# Altium PCB PCB1.PcbDoc
Units mm, origin at the board's own origin, x right, y up, seen from the top; angles counter-clockwise.
Board outline 106.68 x 55.88 mm, 4 copper layers (Top Layer, Layer 1, Layer 2, Bottom Layer), stack 0.806 mm thick; 33 components, 62 nets, 472 pads, 403 vias.
Unrouted connection lines stored in the file: 1.
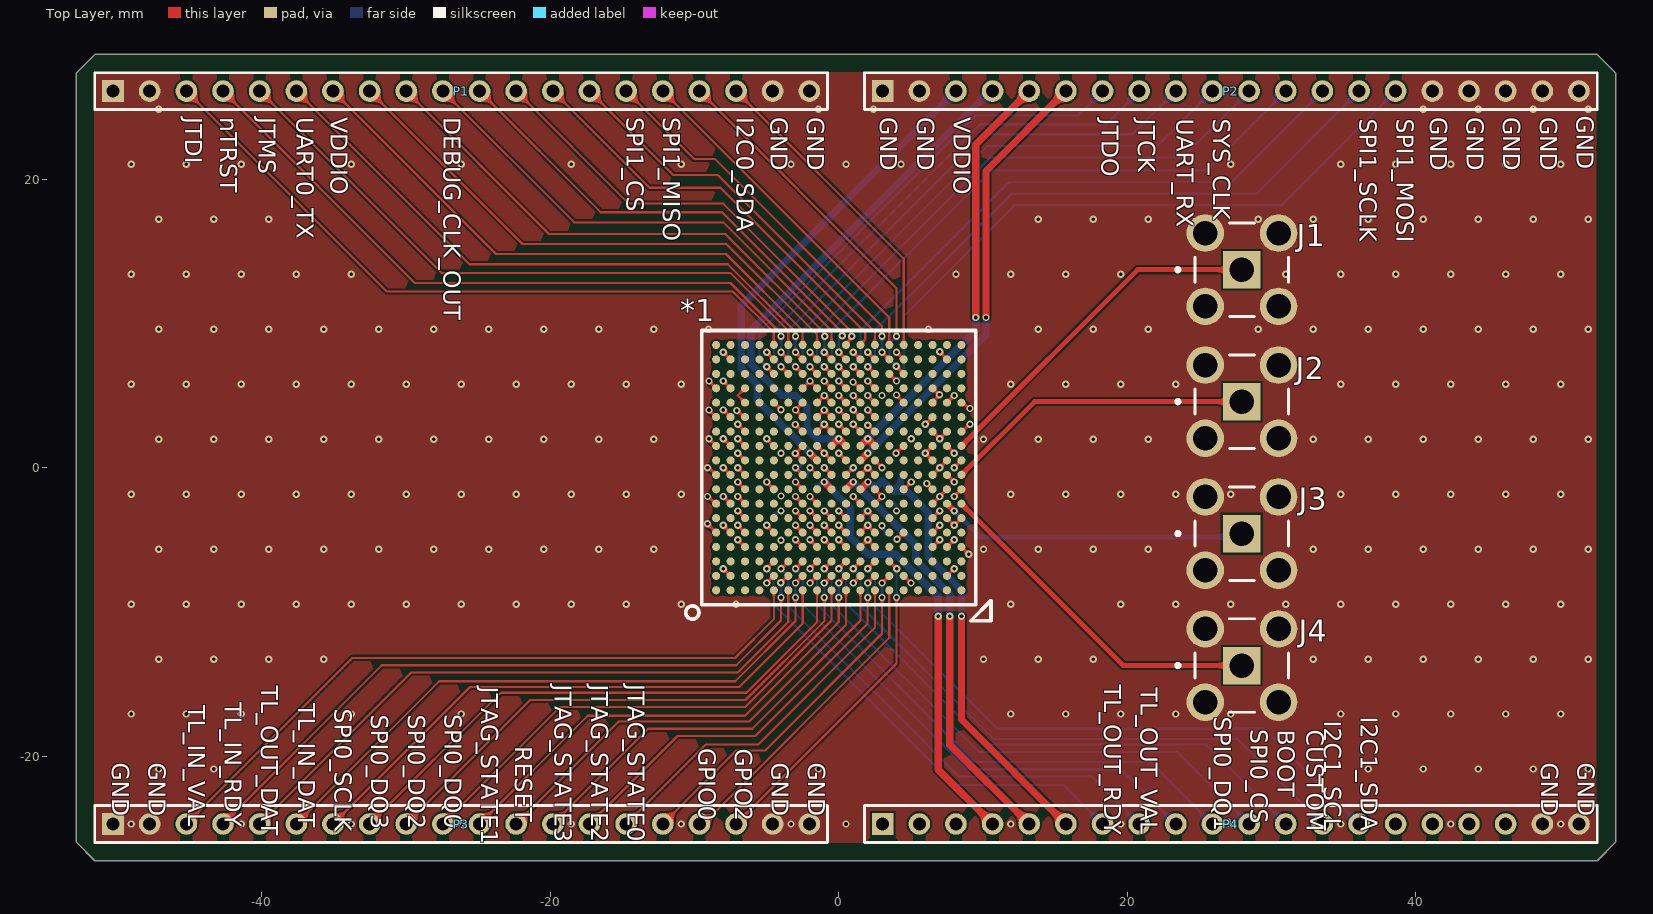
[diagram p0: Top Layer view]
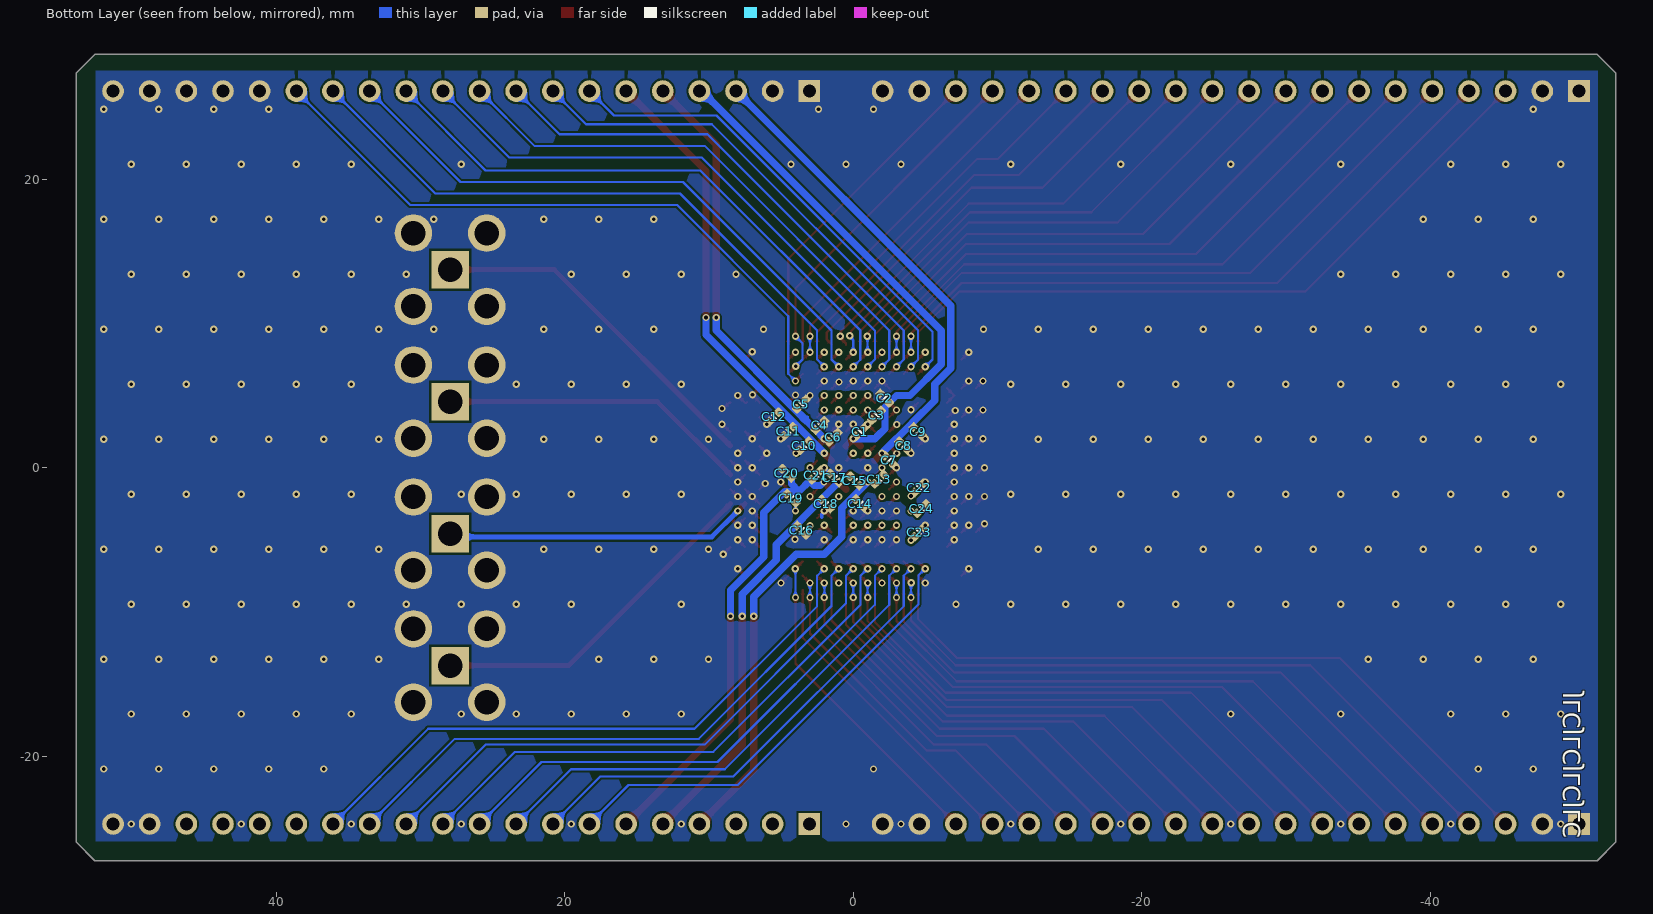
[diagram p1: Bottom Layer view, seen from below]
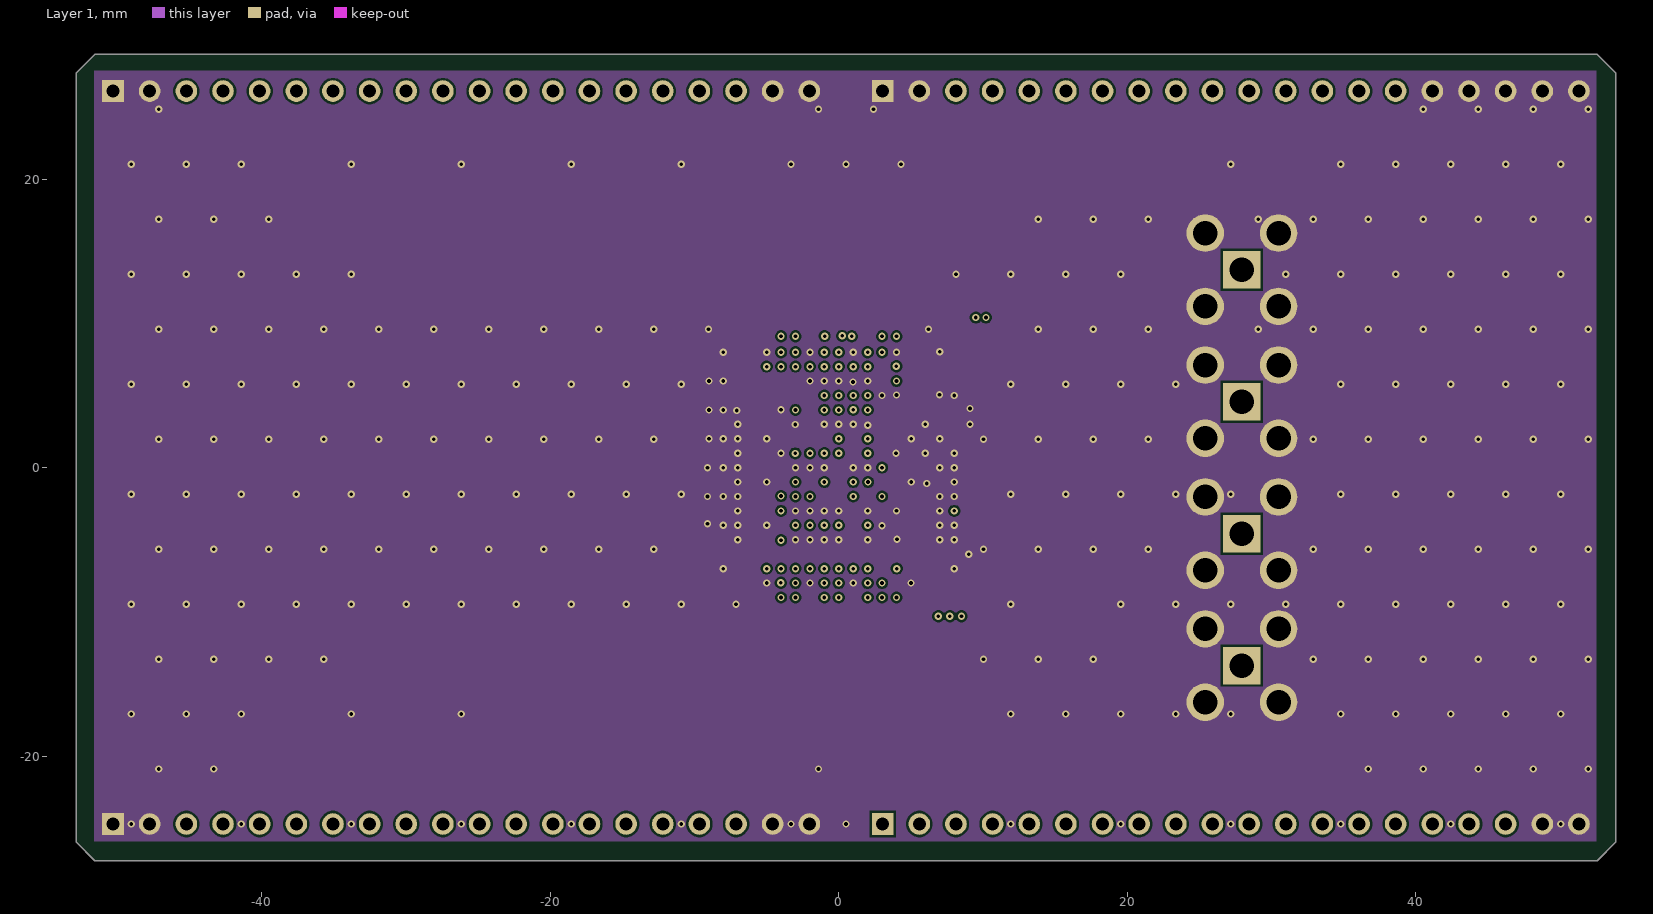
[diagram p2: Layer 1]
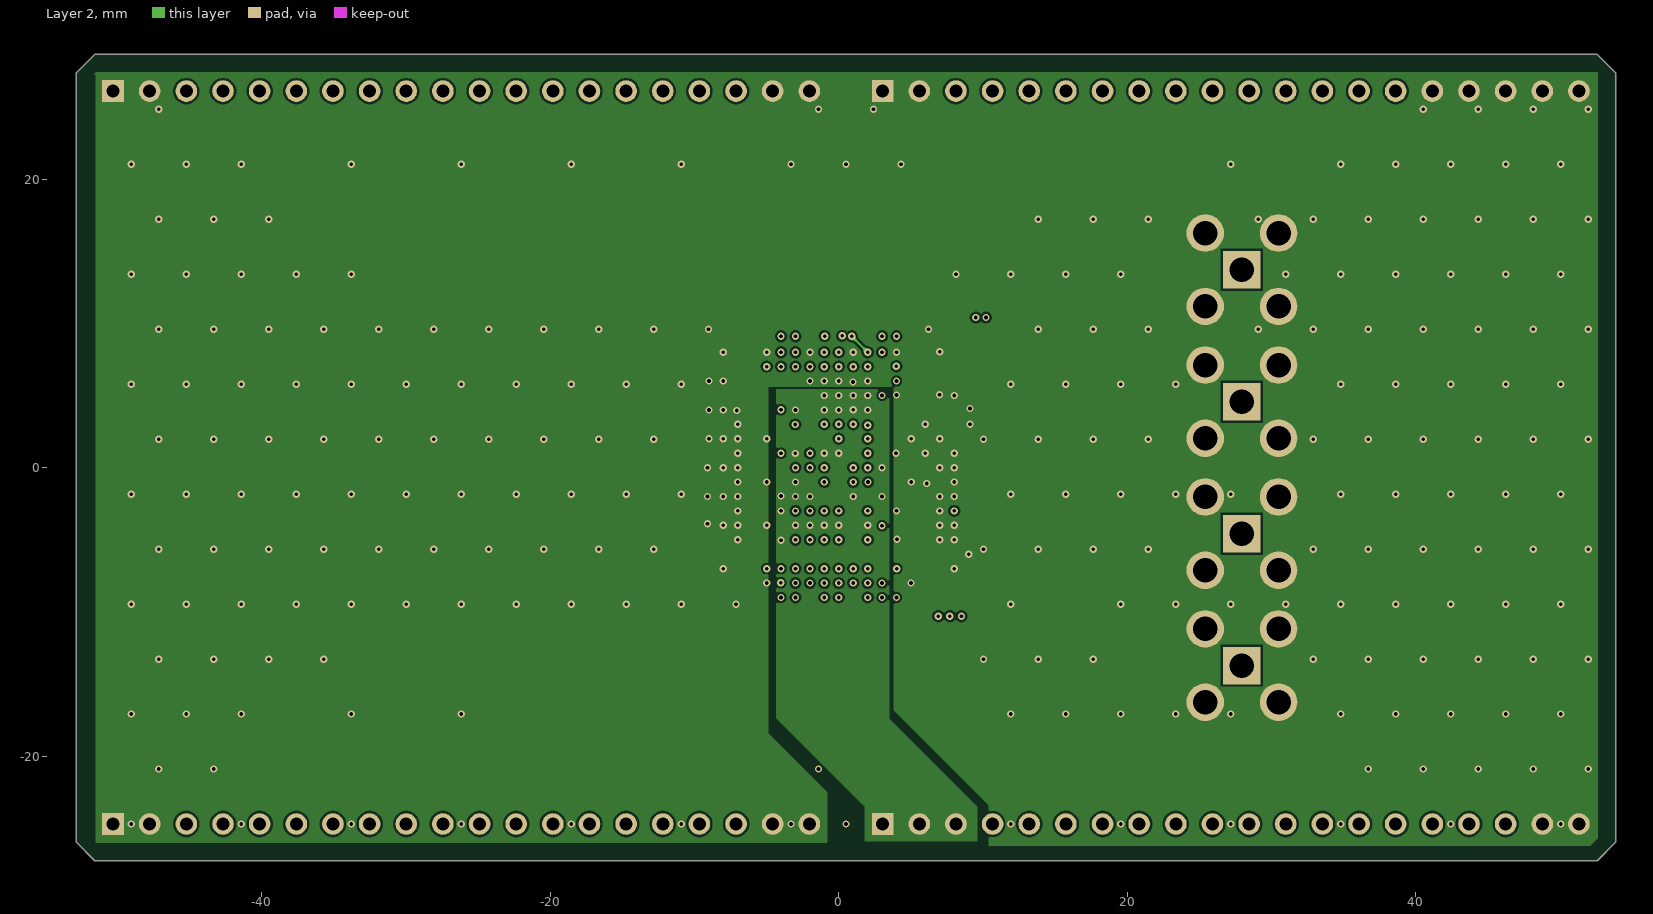
[diagram p3: Layer 2]
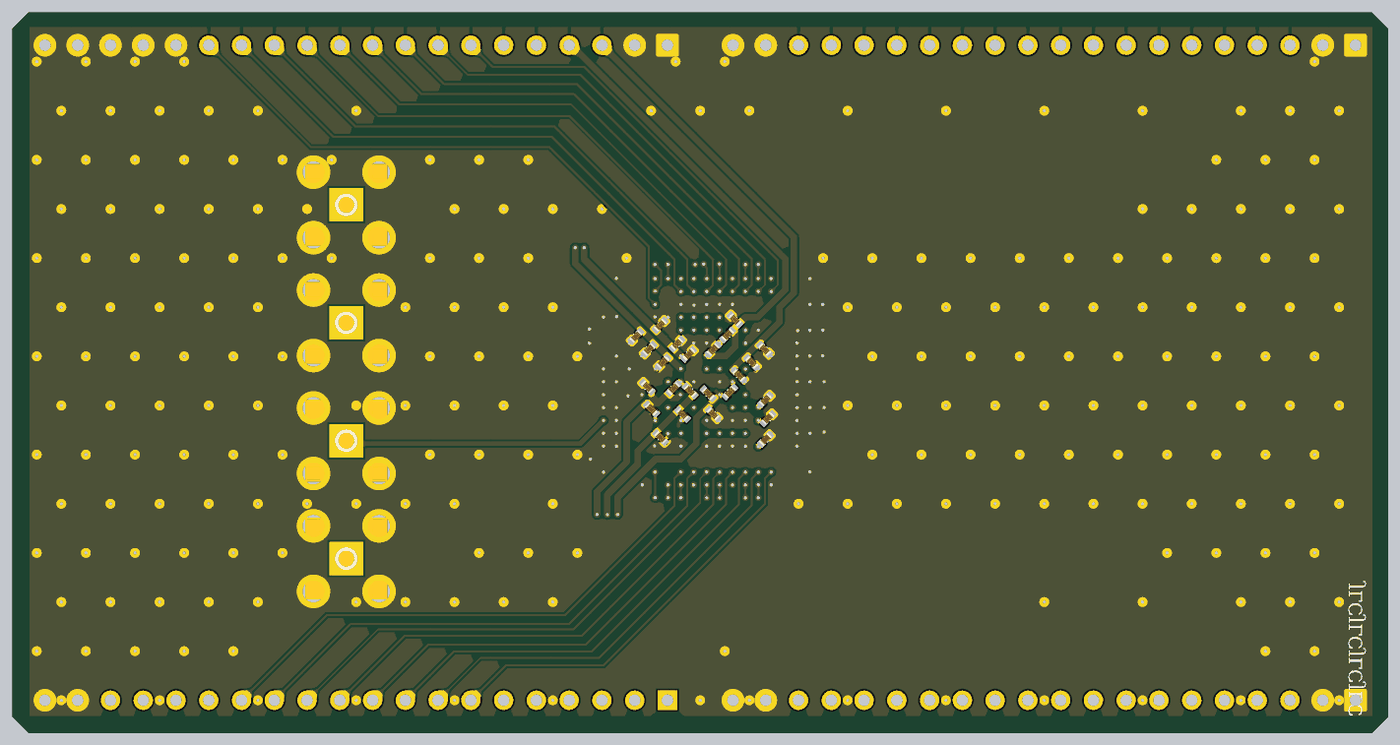
[diagram p4: 3D render of the assembled board from below, using the file's embedded part models]

## Layer stack, top to bottom
Top Solder: solder mask 0.0102, Solder Resist, Dk 3.5
Top Layer: signal copper 0.0175
Dielectric 2: prepreg 0.0889, PP-013, Dk 4.3
Dielectric 4: prepreg 0.1016, PP-016, Dk 4.4
Layer 1: signal copper 0.035
Dielectric 1: dielectric 0.32, FR-4, Dk 4.8
Layer 2: signal copper 0.035
Dielectric 5: prepreg 0.1016, PP-016, Dk 4.4
Dielectric 3: prepreg 0.0889, PP-013, Dk 4.3
Bottom Layer: signal copper 0.0175
Bottom Solder: solder mask 0.0102, Solder Resist, Dk 3.5

## Board outline
-52.84,-25.97 -52.84,27.37 -51.57,28.64 52.57,28.64 53.84,27.37 53.84,-25.97 52.57,-27.24 -51.57,-27.24

## Design rules (kind name [scope] priority, off if disabled: settings)
Clearance [InNetClass('All Nets')] p1: gap=0.152 ignorepadtopadclearanceinfootprint=FALSE except(0.203: Arc-Hole Track-Hole)
FabricationTestPointUsage TestPointUsage [All] p1: valid=0 allowmultiple=FALSE
FabricationTestpoint Testpoint [All] p1: side=3 testpointundercomponent=TRUE minsize=1.016 maxsize=2.54 preferedsize=1.524 minholesize=0.508 maxholesize=1.016 preferedholesize=0.813 testpointgrid=0.025 allowsidetop=TRUE allowsidebottom=TRUE usegrid=TRUE gridtolerance=0
HoleSize [All] p1: absolutevalues=TRUE maxlimit=6.274 minlimit=0.254 maxpercent=80.000 minpercent=20.000
PasteMaskExpansion PasteMaskExpansion_1 [InComponent('P1')] p1: expansion=-3.81
PasteMaskExpansion [All] p2: expansion=0
PlaneClearance [All] p1: clearance=0.152
PlaneConnect [All] p1: planeconnectstyle=Relief reliefexpansion=0.381 reliefentries=4 reliefconductorwidth=0.254 reliefairgap=0.254
PolygonConnect [All] p1: connectstyle=Direct reliefconductorwidth=0.254 reliefentries=4 polygonreliefangle="90 Angle" airgapwidth=0.254
RoutingVias [All] p1: holewidth=0.254 width=0.508 viastyle="Through Hole" minholewidth=0.254 minwidth=0.508 maxholewidth=0.381 maxwidth=1.27
SilkToSolderMaskClearance SilkscreenOverComponentPads [IsPad] p1: minsilkscreentomaskgap=0.254 clearancetoexposedcopper=TRUE
SolderMaskExpansion [All] p1: expansion=0.127 istentingtop=FALSE
UnRoutedNet [All] p1: checkbadconnections=TRUE
Width RF_Stuff [InNet('PADN_LVDS_TX1')] p1: maxlimit=0.348 minlimit=0.168 preferedwidth=0.348 toplayer_minwidth=0.348 midlayer1_maxwidth=0.168 midlayer1_prefwidth=0.168 midlayer2_maxwidth=0.168 midlayer2_prefwidth=0.168 bottomlayer_minwidth=0.348 impedanceprofiledriven=TRUE impedanceprofileid={181A9B05-3AD5-4B76-A0AB-F29331F9D4F9} impedanceprofilevalue=50.000000 minimp=50.000000 maximp=50.000000 favimp=50.000000
Width RF_Stuff_1 [InNet('PADN_LVDS_TX2')] p2: maxlimit=0.348 minlimit=0.168 preferedwidth=0.348 toplayer_minwidth=0.348 midlayer1_maxwidth=0.168 midlayer1_prefwidth=0.168 midlayer2_maxwidth=0.168 midlayer2_prefwidth=0.168 bottomlayer_minwidth=0.348 impedanceprofiledriven=TRUE impedanceprofileid={181A9B05-3AD5-4B76-A0AB-F29331F9D4F9} impedanceprofilevalue=50.000000 minimp=50.000000 maximp=50.000000 favimp=50.000000
Width RF_Stuff_2 [InNet('PADP_LVDS_RX')] p3: maxlimit=0.348 minlimit=0.168 preferedwidth=0.348 toplayer_minwidth=0.348 midlayer1_maxwidth=0.168 midlayer1_prefwidth=0.168 midlayer2_maxwidth=0.168 midlayer2_prefwidth=0.168 bottomlayer_minwidth=0.348 impedanceprofiledriven=TRUE impedanceprofileid={181A9B05-3AD5-4B76-A0AB-F29331F9D4F9} impedanceprofilevalue=50.000000 minimp=50.000000 maximp=50.000000 favimp=50.000000
Width RF_Stuff_3 [InNet('PADN_LVDS_RX')] p4: maxlimit=0.348 minlimit=0.168 preferedwidth=0.348 toplayer_minwidth=0.348 midlayer1_maxwidth=0.168 midlayer1_prefwidth=0.168 midlayer2_maxwidth=0.168 midlayer2_prefwidth=0.168 bottomlayer_minwidth=0.348 impedanceprofiledriven=TRUE impedanceprofileid={181A9B05-3AD5-4B76-A0AB-F29331F9D4F9} impedanceprofilevalue=50.000000 minimp=50.000000 maximp=50.000000 favimp=50.000000
Width Width_1 [All] p5: maxlimit=0.508 minlimit=0.127 preferedwidth=0.254 minimp=50.000000 maximp=50.000000 favimp=50.000000
22 further rules are at their usual default settings.

## Classes and differential pairs
component class Sheet1: Bearly C1 C6 C7 C9 C13 C14 C16 C20 dut J1 J2 J3 J4 P1 P2 P3 P4

## Components (designator, comment, footprint, x,y, rotation, side; value= is the part's Value field where it differs from the comment)
*1 "General" BGA324x18 -8.5,8.5 r0 top locked
C1 "Capacitor 100nF +/-20% 50V 0402" CAPC0402(1005)60_L -0.5,2.5 r315 bottom value=100nF
C2 "Capacitor 1µF +/-20% 10V 0402" CAPC0402(1005)60_L -2.182,4.818 r225 bottom value=1µF
C3 "Capacitor 10µF +/-40% 6.3V 0402" CAPC0402(1005)60_L -1.627,3.642 r135 bottom value=10µF
C4 "Capacitor 100nF +/-20% 50V 0402" CAPC0402(1005)60_L 2.303,2.928 r315 bottom value=100nF
C5 "Capacitor 1µF +/-20% 10V 0402" CAPC0402(1005)60_L 3.6,4.4 r315 bottom value=1µF
C6 "Capacitor 10µF +/-40% 6.3V 0402" CAPC0402(1005)60_L 1.382,2.118 r315 bottom value=10µF
C7 "Capacitor 100nF +/-20% 50V 0402" CAPC0402(1005)60_L -2.5,0.5 r45 bottom value=100nF
C8 "Capacitor 1µF +/-20% 10V 0402" CAPC0402(1005)60_L -3.5,1.5 r45 bottom value=1µF
C9 "Capacitor 10µF +/-40% 6.3V 0402" CAPC0402(1005)60_L -4.5,2.5 r45 bottom value=10µF
C10 "Capacitor 100nF +/-20% 50V 0402" CAPC0402(1005)60_L 3.382,1.518 r135 bottom value=100nF
C11 "Capacitor 1µF +/-20% 10V 0402" CAPC0402(1005)60_L 4.482,2.518 r135 bottom value=1µF
C12 "Capacitor 10µF +/-40% 6.3V 0402" CAPC0402(1005)60_L 5.482,3.518 r135 bottom value=10µF
C13 "Capacitor 100nF +/-20% 50V 0402" CAPC0402(1005)60_L -1.8,-0.8 r315 bottom value=100nF
C14 "Capacitor 1µF +/-20% 10V 0402" CAPC0402(1005)60_L -0.5,-2.5 r45 bottom value=1µF
C15 "Capacitor 10µF +/-40% 6.3V 0402" CAPC0402(1005)60_L -0.118,-0.918 r225 bottom value=10µF
C16 "Capacitor 100nF +/-20% 50V 0402" CAPC0402(1005)60_L 3.568,-4.329 r45 bottom value=100nF
C17 "Capacitor 1µF +/-20% 10V 0402" CAPC0402(1005)60_L 1.282,-0.718 r225 bottom value=1µF
C18 "Capacitor 10µF +/-40% 6.3V 0402" CAPC0402(1005)60_L 1.882,-2.518 r45 bottom value=10µF
C19 "Capacitor 100nF +/-20% 50V 0402" CAPC0402(1005)60_L 4.282,-2.118 r45 bottom value=100nF
C20 "Capacitor 1µF +/-20% 10V 0402" CAPC0402(1005)60_L 4.6,-0.4 r225 bottom value=1µF
C21 "Capacitor 10µF +/-40% 6.3V 0402" CAPC0402(1005)60_L 2.565,-0.515 r315 bottom value=10µF
C22 "Capacitor 100nF +/-20% 50V 0402" CAPC0402(1005)60_L -4.563,-1.4 r315 bottom value=100nF
C23 "Capacitor 1µF +/-20% 10V 0402" CAPC0402(1005)60_L -4.564,-4.469 r315 bottom value=1µF
C24 "Capacitor 10µF +/-40% 6.3V 0402" CAPC0402(1005)60_L -4.743,-2.842 r315 bottom value=10µF
J1 "1053354-1" FP-1053354-1-MFG 27.94,13.716 r0 top
J2 "1053354-1" FP-1053354-1-MFG 27.94,4.572 r0 top
J3 "1053354-1" FP-1053354-1-MFG 27.94,-4.572 r0 top
J4 "1053354-1" FP-1053354-1-MFG 27.94,-13.716 r0 top
P1 "Header 20" HDR1X20 -50.3,26.1 r0 top
P2 "Header 20" HDR1X20 3.04,26.1 r0 top
P3 "Header 20" HDR1X20 -50.3,-24.7 r0 top
P4 "Header 20" HDR1X20 3.04,-24.7 r0 top

## Footprints (in the part's own frame and the unit in brackets; to place one, negate y for a bottom-side part, rotate by r counter-clockwise, add the part's x,y. Pads: shape width x height; smd on the part's side, far side on the other; paste and mask are expansions set on the pad)
BGA324x18 [mm]
  round 0.56 smd: 1(0,0) 2(1,0) 3(2,0) 4(3,0) 5(4,0) 6(5,0) 7(6,0) 8(7,0) 9(8,0) 10(9,0) 11(10,0) 12(11,0) 13(12,0) 14(13,0) 15(14,0) 16(15,0) 17(16,0) 18(17,0) 19(0,-1) 20(1,-1) 21(2,-1) 22(3,-1) 23(4,-1) 24(5,-1) 25(6,-1) 26(7,-1) 27(8,-1) 28(9,-1) 29(10,-1) 30(11,-1) 31(12,-1) 32(13,-1) 33(14,-1) 34(15,-1) 35(16,-1) 36(17,-1) 37(0,-2) 38(1,-2) 39(2,-2) 40(3,-2) 41(4,-2) 42(5,-2) 43(6,-2) 44(7,-2) 45(8,-2) 46(9,-2) 47(10,-2) 48(11,-2) 49(12,-2) 50(13,-2) 51(14,-2) 52(15,-2) 53(16,-2) 54(17,-2) 55(0,-3) 56(1,-3) 57(2,-3) 58(3,-3) 59(4,-3) 60(5,-3) 61(6,-3) 62(7,-3) 63(8,-3) 64(9,-3) 65(10,-3) 66(11,-3) 67(12,-3) 68(13,-3) 69(14,-3) 70(15,-3) 71(16,-3) 72(17,-3) 73(0,-4) 74(1,-4) 75(2,-4) 76(3,-4) 77(4,-4) 78(5,-4) 79(6,-4) 80(7,-4) 81(8,-4) 82(9,-4) 83(10,-4) 84(11,-4) 85(12,-4) 86(13,-4) 87(14,-4) 88(15,-4) 89(16,-4) 90(17,-4) 91(0,-5) 92(1,-5) 93(2,-5) 94(3,-5) 95(4,-5) 96(5,-5) 97(6,-5) 98(7,-5) 99(8,-5) 100(9,-5) 101(10,-5) 102(11,-5) 103(12,-5) 104(13,-5) 105(14,-5) 106(15,-5) 107(16,-5) 108(17,-5) 109(0,-6) 110(1,-6) 111(2,-6) 112(3,-6) 113(4,-6) 114(5,-6) 115(6,-6) 116(7,-6) 117(8,-6) 118(9,-6) 119(10,-6) 120(11,-6) 121(12,-6) 122(13,-6) 123(14,-6) 124(15,-6) 125(16,-6) 126(17,-6) 127(0,-7) 128(1,-7) 129(2,-7) 130(3,-7) 131(4,-7) 132(5,-7) 133(6,-7) 134(7,-7) 135(8,-7) 136(9,-7) 137(10,-7) 138(11,-7) 139(12,-7) 140(13,-7) 141(14,-7) 142(15,-7) 143(16,-7) 144(17,-7) 145(0,-8) 146(1,-8) 147(2,-8) 148(3,-8) 149(4,-8) 150(5,-8) 151(6,-8) 152(7,-8) 153(8,-8) 154(9,-8) 155(10,-8) 156(11,-8) 157(12,-8) 158(13,-8) 159(14,-8) 160(15,-8) 161(16,-8) 162(17,-8) 163(0,-9) 164(1,-9) 165(2,-9) 166(3,-9) 167(4,-9) 168(5,-9) 169(6,-9) 170(7,-9) 171(8,-9) 172(9,-9) 173(10,-9) 174(11,-9) 175(12,-9) 176(13,-9) 177(14,-9) 178(15,-9) 179(16,-9) 180(17,-9) 181(0,-10) 182(1,-10) 183(2,-10) 184(3,-10) 185(4,-10) 186(5,-10) 187(6,-10) 188(7,-10) 189(8,-10) 190(9,-10) 191(10,-10) 192(11,-10) 193(12,-10) 194(13,-10) 195(14,-10) 196(15,-10) 197(16,-10) 198(17,-10) 199(0,-11) 200(1,-11) 201(2,-11) 202(3,-11) 203(4,-11) 204(5,-11) 205(6,-11) 206(7,-11) 207(8,-11) 208(9,-11) 209(10,-11) 210(11,-11) 211(12,-11) 212(13,-11) 213(14,-11) 214(15,-11) 215(16,-11) 216(17,-11) 217(0,-12) 218(1,-12) 219(2,-12) 220(3,-12) 221(4,-12) 222(5,-12) 223(6,-12) 224(7,-12) 225(8,-12) 226(9,-12) 227(10,-12) 228(11,-12) 229(12,-12) 230(13,-12) 231(14,-12) 232(15,-12) 233(16,-12) 234(17,-12) 235(0,-13) 236(1,-13) 237(2,-13) 238(3,-13) 239(4,-13) 240(5,-13) 241(6,-13) 242(7,-13) 243(8,-13) 244(9,-13) 245(10,-13) 246(11,-13) 247(12,-13) 248(13,-13) 249(14,-13) 250(15,-13) 251(16,-13) 252(17,-13) 253(0,-14) 254(1,-14) 255(2,-14) 256(3,-14) 257(4,-14) 258(5,-14) 259(6,-14) 260(7,-14) 261(8,-14) 262(9,-14) 263(10,-14) 264(11,-14) 265(12,-14) 266(13,-14) 267(14,-14) 268(15,-14) 269(16,-14) 270(17,-14) 271(0,-15) 272(1,-15) 273(2,-15) 274(3,-15) 275(4,-15) 276(5,-15) 277(6,-15) 278(7,-15) 279(8,-15) 280(9,-15) 281(10,-15) 282(11,-15) 283(12,-15) 284(13,-15) 285(14,-15) 286(15,-15) 287(16,-15) 288(17,-15) 289(0,-16) 290(1,-16) 291(2,-16) 292(3,-16) 293(4,-16) 294(5,-16) 295(6,-16) 296(7,-16) 297(8,-16) 298(9,-16) 299(10,-16) 300(11,-16) 301(12,-16) 302(13,-16) 303(14,-16) 304(15,-16) 305(16,-16) 306(17,-16) 307(0,-17) 308(1,-17) 309(2,-17) 310(3,-17) 311(4,-17) 312(5,-17) 313(6,-17) 314(7,-17) 315(8,-17) 316(9,-17) 317(10,-17) 318(11,-17) 319(12,-17) 320(13,-17) 321(14,-17) 322(15,-17) 323(16,-17) 324(17,-17)
  silkscreen extent -2.11,-19.11 19.05,1
CAPC0402(1005)60_L [mm] "Chip Capacitor, Body 1.0x0.5mm, Height 0.6mm, IPC High Density"
  rrect25% 0.5x0.55 smd: 1(-0.45,0) 2(0.45,0)
  silkscreen extent 0,-0.2 0,0.2, body extent -0.5,-0.25 0.5,0.25, height 0.6
FP-1053354-1-MFG [mm]
  rect 2.6x2.6 hole 1.7 paste-1000 mask+0: 1(0,0)
  round 2.6 hole 1.7 paste-1000 mask+0: 2(-2.54,2.54) 3(2.54,2.54) 4(-2.54,-2.54) 5(2.54,-2.54)
  silkscreen extent -4.56,-3.24 3.24,3.24, body extent -3.94,-3.94 3.94,3.94, height 0.25
HDR1X20 [mm] "Connector; Header; 20 Position"
  rect 1.5x1.5 hole 0.9: 1(0,0)
  round 1.5 hole 0.9: 2(2.54,0) 3(5.08,0) 4(7.62,0) 5(10.16,0) 6(12.7,0) 7(15.24,0) 8(17.78,0) 9(20.32,0) 10(22.86,0) 11(25.4,0) 12(27.94,0) 13(30.48,0) 14(33.02,0) 15(35.56,0) 16(38.1,0) 17(40.64,0) 18(43.18,0) 19(45.72,0) 20(48.26,0)
  silkscreen extent -1.27,-1.27 49.53,1.27

## Part data
*1: library part CMP-027-000000-4, Design Item ID=General, Source=SCUM-V.SchLib
C1 C4 C7 C10 C13 C16 C19 C22: library part CMP-001-00067-3, "Chip Capacitor, 100nF +/-20%, 50V, 0402, Thickness 0.6 mm", Case/Package=0402, Max Operating Temperature=85°C, Min Operating Temperature=-55°C, Tolerance=10%, Voltage Rating=50V, Mounting Technology=SMT, Pins=2
C2 C5 C8 C11 C14 C17 C20 C23: library part CMP-001-00063-3, "Chip Capacitor, 1µF +/-20%, 10V, 0402, Thickness 0.6 mm", Case/Package=0402, Max Operating Temperature=85°C, Min Operating Temperature=-55°C, Tolerance=10%, Voltage Rating=10V, Mounting Technology=SMT, Pins=2
C3 C6 C9 C12 C15 C18 C21 C24: library part CMP-001-00074-3, "Chip Capacitor, 10µF +/-40%, 6.3V, 0402, Thickness 0.6 mm", Case/Package=0402, Max Operating Temperature=85°C, Min Operating Temperature=-55°C, Tolerance=10%, Voltage Rating=6.3V, Mounting Technology=SMT, Pins=2
J1 J2 J3 J4: library part CMP-2000-05830-2, "CONN SMA JACK STR 50 OHM PCB", Case/Package=SMA, Dielectric Material=PTFE, Frequency=18GHz, Housing Color=Gold, Max Frequency=12.4GHz, Operating Frequency=N/A, Package Quantity=125, Body Material="Stainless Steel", Body Plating=Gold, Center Contact Plating=Gold, Connector Type=SMA, Contact Material=Copper, Contact Plating=Gold, Depth=6.3mm, Fastening Type=Threaded, Gender=Female, Height=9.5mm, Impedance=50R, Insulation Material=Polytetrafluoroethylene, Length=9.53mm, Mating Cycles=500, Mount="Through Hole", Number of Ports=1, Orientation=Straight, Packaging=Bag, PCB Mounting Orientation=Vertical, Plating=Gold, Polarity=Normal, Radiation Hardening=No, REACH SVHC="No SVHC", RoHS Compliant=Yes, Series=SMA, Termination=Solder
P1 P2 P3 P4: "Header, 20-Pin", LatestRevisionDate=17-Jul-2002, LatestRevisionNote="Re-released for DXP Platform.", Publisher="Altium Limited"

## Via types
v1: diameter 0.508, hole 0.254, Top Layer to Bottom Layer, 226 vias
v2: diameter 0.508, hole 0.254, Top Layer to Bottom Layer, tented both sides, 177 vias

## Nets (pads, with @x,y where several pads share a name; then routed paths per layer and width w, separated by ;. In a path a pad name is that pad's centre, name@x,y a point inside that pad or via, vN(x,y) a via of type N, cw(c..) or ccw(c..) an arc to the next point about the centre after c; other vN are vias at no path point)
BD1: *1.49 P2.15 | length 46
  Top Layer w0.152: *1.49 v2(4,6)
  Bottom Layer w0.152: v2(4,6) 4.5,6.5 4.5,10.5 12.2,18.2 30.7,18.2 P2.15
BD2: *1.31 P1.15 | length 27
  Top Layer w0.152: P1.15 -10.04,21.4 -8.6,21.4 3,9.8 v2(3,9.1) ; v2(3,8) *1.31
  Bottom Layer w0.152: v2(3,8) v2(3,9.1)
BD3: *1.14 P1.18 | length 22.4
  Top Layer w0.152: P1.18 4.5,14.48 *1.14
BD4: *1.48 P2.14 | length 43.9
  Top Layer w0.152: v2(2,7) *1.48
  Bottom Layer w0.152: v2(2,7) 2.5,7.5 2.5,9.5 12,19 28.96,19 P2.14
BD_LVDS: *1.319 P3.17 | length 21.8
  Top Layer w0.152: P3.17 -9.4,-24.7 3.5,-11.8 *1.319
BDFS1: *1.47 P2.13 | length 42.3
  Top Layer w0.152: v2(1,7) *1.47
  Bottom Layer w0.152: v2(1,7) 1.5,7.5 1.5,9.5 11.8,19.8 27.22,19.8 P2.13
BDFS2: *1.12 P1.14 | length 27.6
  Top Layer w0.152: P1.14 -11.463,20.283 -8.383,20.283 2.5,9.4 *1.12
BDFS3: *1.11 P1.13 | length 29.6
  Top Layer w0.152: P1.13 -13.12,19.4 -8.194,19.4 1.836,9.37 1.836,8.884 1.5,8.548 *1.11
BDFS4: *1.28 P1.11 | length 34.2
  Top Layer w0.152: P1.11 -16.5,17.7 -8.1,17.7 0.162,9.438 0.162,9.199 v2(0.23,9.131) ; v2(0,8) *1.28
  Bottom Layer w0.152: v2(0,8) 0,8.843 0.23,9.073 v2(0.23,9.131)
CNTR_EN: *1.315 P3.10 | length 34.9
  Top Layer w0.152: P3.10 -19.34,-16.6 -6.5,-16.6 -0.5,-10.6 *1.315
GND: *1.20 *1.23 *1.26 *1.29 *1.32 *1.35 *1.55 *1.56 *1.57 *1.61 *1.62 *1.63 *1.64 *1.65 *1.66 *1.70 *1.75 *1.77 *1.86 *1.88 *1.89 *1.90 *1.91 *1.92 *1.93 *1.106 *1.111 *1.115 *1.116 *1.117 *1.118 *1.119 *1.120 *1.124 *1.125 *1.126 *1.127 *1.128 *1.129 *1.131 *1.140 *1.142 *1.143 *1.147 *1.160 *1.161 *1.162 *1.163 *1.164 *1.165 *1.169 *1.170 *1.171 *1.172 *1.173 *1.174 *1.178 *1.179 *1.183 *1.185 *1.194 *1.196 *1.197 *1.198 *1.199 *1.200 *1.201 *1.214 *1.219 *1.223 *1.224 *1.225 *1.226 *1.227 *1.228 *1.232 *1.233 *1.234 *1.235 *1.236 *1.237 *1.239 *1.248 *1.250 *1.255 *1.259 *1.260 *1.261 *1.262 *1.263 *1.264 *1.268 *1.269 *1.270 *1.290 *1.293 *1.296 *1.299 *1.302 *1.305 C1.1 C2.1 C3.1 C4.1 C5.1 C6.1 C7.1 C8.1 C9.1 C10.1 C11.1 C12.1 C13.1 C14.1 C16.1 C17.1 C18.1 C19.1 C20.1 C21.1 C22.1 C23.1 C24.1 J1.2 J1.3 J1.4 J1.5 J2.2 J2.3 J2.4 J2.5 J3.2 J3.3 J3.4 J3.5 J4.2 J4.3 J4.4 J4.5 P1.1 P1.2 P1.19 P1.20 P2.1 P2.2 P2.16 P2.17 P2.18 P2.19 P2.20 P3.1 P3.2 P3.19 P3.20 P4.19 P4.20 | length 76.6
  Top Layer w0.152: v2(-9.1,-3.9) *1.235 ; v2(-9.1,-2) -9.05,-2 -8.6,-2.45 -8.6,-2.5 *1.199 ; v2(-9.1,0) -9,0 *1.163 ; v2(-9,2) *1.127 ; v2(-9,4) *1.91 ; v2(-9,6) *1.55 ; v2(-8,-7) *1.290 ; v2(-8,-4) *1.236 ; v2(-8,-2) *1.200 ; v2(-8,0) *1.164 ; v2(-8,2) *1.128 ; v2(-8,4) *1.92 ; v2(-8,6) *1.56 ; v2(-8,8) *1.20 ; v2(-7.071,3.964) -7.018,3.964 -6.554,3.5 *1.93 ; v2(-7,-5) *1.255 ; v2(-7,-4) *1.237 ; v2(-7,-3) *1.219 ; v2(-7,-2) *1.201 ; v2(-7,-1) *1.183 ; v2(-7,0) *1.165 ; v2(-7,1) *1.147 ; v2(-7,2) *1.129 ; v2(-7,3) *1.111 ; *1.75 -7,5 *1.57 ; v2(-5,-8) *1.293 ; v2(-5,-4) *1.239 ; v2(-5,-1) *1.185 ; v2(-5,2) *1.131 ; v2(-5,8) *1.23 ; *1.77 -4.485,4.5 v2(-4,4.015) ; v2(-3.015,2.985) -3,2.985 -2.515,2.5 *1.115 ; v2(-3,-5) *1.259 ; v2(-3,-3) *1.223 ; v2(-3,0) *1.169 ; *1.61 v2(-2,6) *1.62 ; v2(-2,-5) *1.260 ; v2(-2,-3) *1.224 ; v2(-2,0) *1.170 ; v2(-2,8) *1.26 ; v2(-2,-8) *1.296 ; *1.116 v2(-1,3) *1.117 ; v2(-1,-5) *1.261 ; v2(-1,-3) *1.225 ; v2(-1,0) *1.171 ; v2(-1,6) *1.63 ; v2(0,-5) *1.262 ; v2(0,-3) *1.226 ; v2(0,3) *1.118 ; v2(0,6) *1.64 ; *1.172@0.323,-0.323 *1.172 v2(1,0) ; v2(0.98,5.934) 1.023,5.934 1.457,5.5 *1.65 ; v2(1,-8) *1.299 ; v2(1,3) *1.119 ; v2(1,8) *1.29 ; *1.263 v2(2,-5) *1.264 ; *1.227 v2(2,-3) *1.228 ; *1.173 1.86,-0.14 v2(2,0) *1.174 ; v2(2,2.941) 2.03,2.941 2.47,2.5 *1.120 ; v2(2,6) *1.66 ; v2(3.97,1) 3.985,1 4.485,1.5 *1.140 ; v2(4,5.03) 4,5.015 4.5,4.515 *1.86 ; v2(4,8) *1.32 ; v2(4.033,-4.967) *1.248 ; *1.302 v2(5,-8) ; *1.194 4.515,-1.5 5.015,-1 v2(5.03,-1) ; v2(6,3) *1.106 ; v2(6.1,-1.1) *1.196 ; *1.268 v2(7,-5) ; *1.250 v2(7,-4) ; *1.232 v2(7,-3) ; *1.214 6.9,-2.1 6.9,-2 v2(7,-2) *1.197 ; *1.178 v2(7,0) *1.161 ; *1.160 v2(6,1) 6.14,1.14 *1.142 ; *1.124 v2(7,2) *1.125 ; *1.88 6.5,4.533 6.983,5.016 v2(6.983,5.049) ; *1.70 6.516,5.5 6.916,5.1 v2@6.964,5.1 ; v2(7,8.03) 7,8.015 7.5,7.515 *1.35 ; *1.89@7.36,4.534 *1.89@7.418,4.476 ; *1.305 v2(8,-7) ; *1.269 v2(8,-5) ; *1.233 v2(8,-4) *1.234 ; *1.179 v2(8,-1) ; *1.143 v2(8,1) ; *1.89 v2(8,5) ; v2(8,-2) *1.198 ; v2(8,0) *1.162 ; *1.270 v2(9,-6) ; *1.126 8.55,2.5 9.05,3 v2(9.1,3) ; *1.90 8.604,4.5 9.004,4.1 v2(9.1,4.1)
  Bottom Layer w0.152: v2(-5,2) C9.1@-5,2.096 ; v2(-4,1) C8.1 ; C18.1@1.6,-2.93 1.62,-2.95 C18.1@1.8,-2.95 ; v2(3,-4.03) v2@3,-4 ; C19.1@3.7,-2.35 3.725,-2.35 3.899,-2.524 3.899,-2.549 4,-2.65 v2(4,-3) ; v2@3.902,0.932 v2(3.97,1)
  Bottom Layer w0.254: C7.1@-2.718,0.082 C7.1@-2.636,0.164 ; C13.1@-2.218,-0.582 -2.218,-0.408 C13.1@-2.049,-0.238 ; v2@-2.014,0.014 v2(-2,0) ; C3.1@-1.482,3.282 -1.351,3.282 -1.069,3 v2(-1,3) ; C17.1 v2(2,0) 2.05,0 2.45,-0.4 2.5,-0.4 ; v2(2,-3) 2,-3.069 2.182,-3.251 2.182,-3.418 ; v2(3,-4.03) 3.049,-4.078 3.049,-4.272 3.25,-4.474 C16.1
  other v1: -49.03,-24.7 -41.41,-24.7 -33.79,-24.7 -26.17,-24.7 -18.55,-24.7 -10.93,-24.7 -3.31,-24.7 0.5,-24.7 11.93,-24.7 19.55,-24.7 27.17,-24.7 34.79,-24.7 42.41,-24.7 50.03,-24.7 -47.125,-20.89 -43.315,-20.89 -1.405,-20.89 36.695,-20.89 40.505,-20.89 44.315,-20.89 48.125,-20.89 51.935,-20.89 -49.03,-17.08 -45.22,-17.08 -41.41,-17.08 -33.79,-17.08 -26.17,-17.08 11.93,-17.08 15.74,-17.08 19.55,-17.08 23.36,-17.08 27.17,-17.08 34.79,-17.08 38.6,-17.08 42.41,-17.08 46.22,-17.08 50.03,-17.08 -47.125,-13.27 -43.315,-13.27 -39.505,-13.27 -35.695,-13.27 10.025,-13.27 13.835,-13.27 17.645,-13.27 32.885,-13.27 36.695,-13.27 40.505,-13.27 44.315,-13.27 48.125,-13.27 51.935,-13.27 -49.03,-9.46 -45.22,-9.46 -41.41,-9.46 -37.6,-9.46 -33.79,-9.46 -29.98,-9.46 -26.17,-9.46 -22.36,-9.46 -18.55,-9.46 -14.74,-9.46 -10.93,-9.46 -7.12,-9.46 11.93,-9.46 19.55,-9.46 23.36,-9.46 27.17,-9.46 30.98,-9.46 34.79,-9.46 38.6,-9.46 42.41,-9.46 46.22,-9.46 50.03,-9.46 -47.125,-5.65 -43.315,-5.65 -39.505,-5.65 -35.695,-5.65 -31.885,-5.65 -28.075,-5.65 -24.265,-5.65 -20.455,-5.65 -16.645,-5.65 -12.835,-5.65 10.025,-5.65 13.835,-5.65 17.645,-5.65 21.455,-5.65 32.885,-5.65 36.695,-5.65 40.505,-5.65 44.315,-5.65 48.125,-5.65 51.935,-5.65 -49.03,-1.84 -45.22,-1.84 -41.41,-1.84 -37.6,-1.84 -33.79,-1.84 -29.98,-1.84 -26.17,-1.84 -22.36,-1.84 -18.55,-1.84 -14.74,-1.84 -10.93,-1.84 11.93,-1.84 15.74,-1.84 19.55,-1.84 23.36,-1.84 27.17,-1.84 34.79,-1.84 38.6,-1.84 42.41,-1.84 46.22,-1.84 50.03,-1.84 -47.125,1.97 -43.315,1.97 -39.505,1.97 -35.695,1.97 -31.885,1.97 -28.075,1.97 -24.265,1.97 -20.455,1.97 -16.645,1.97 -12.835,1.97 10.025,1.97 13.835,1.97 17.645,1.97 21.455,1.97 32.885,1.97 36.695,1.97 40.505,1.97 44.315,1.97 48.125,1.97 51.935,1.97 -49.03,5.78 -45.22,5.78 -41.41,5.78 -37.6,5.78 -33.79,5.78 -29.98,5.78 -26.17,5.78 -22.36,5.78 -18.55,5.78 -14.74,5.78 -10.93,5.78 11.93,5.78 15.74,5.78 19.55,5.78 23.36,5.78 34.79,5.78 38.6,5.78 42.41,5.78 46.22,5.78 50.03,5.78 -47.125,9.59 -43.315,9.59 -39.505,9.59 -35.695,9.59 -31.885,9.59 -28.075,9.59 -24.265,9.59 -20.455,9.59 -16.645,9.59 -12.835,9.59 -9.025,9.59 6.215,9.59 13.835,9.59 17.645,9.59 21.455,9.59 29.075,9.59 32.885,9.59 36.695,9.59 40.505,9.59 44.315,9.59 48.125,9.59 51.935,9.59 -49.03,13.4 -45.22,13.4 -41.41,13.4 -37.6,13.4 -33.79,13.4 8.12,13.4 11.93,13.4 15.74,13.4 19.55,13.4 30.98,13.4 34.79,13.4 38.6,13.4 42.41,13.4 46.22,13.4 50.03,13.4 -47.125,17.21 -43.315,17.21 -39.505,17.21 13.835,17.21 17.645,17.21 21.455,17.21 29.075,17.21 32.885,17.21 36.695,17.21 40.505,17.21 44.315,17.21 48.125,17.21 51.935,17.21 -49.03,21.02 -45.22,21.02 -41.41,21.02 -33.79,21.02 -26.17,21.02 -18.55,21.02 -10.93,21.02 -3.31,21.02 0.5,21.02 4.31,21.02 27.17,21.02 34.79,21.02 38.6,21.02 42.41,21.02 46.22,21.02 50.03,21.02 -47.125,24.83 -1.405,24.83 2.405,24.83 40.505,24.83 44.315,24.83 48.125,24.83 51.935,24.83
  other v2: 6,1 5.03,2 3,5
IDV_COUNT(0): *1.44 P2.10 | length 38.7
  Top Layer w0.152: v2(-2,7) *1.44
  Bottom Layer w0.152: v2(-2,7) -2.5,7.5 -2.5,9.5 10.3,22.3 22.1,22.3 P2.10
IDV_COUNT(1): *1.8 P1.8 | length 38.7
  Top Layer w0.152: P1.8 -21.92,15.5 -7.8,15.5 -1.5,9.2 *1.8
IDV_COUNT(2): *1.25 P1.6 | length 43.6
  Top Layer w0.152: P1.6 -25.6,14.1 -7.686,14.1 -3.032,9.446 -3.032,9.132 v2(-3,9.1) ; v2(-3,8) *1.25
  Bottom Layer w0.152: v2(-3,8) v2(-3,9.1)
IDV_COUNT(3): *1.9 P1.10 | length 34.8
  Top Layer w0.152: P1.10 -18.34,17 -8.018,17 -0.5,9.482 *1.9
IDV_COUNT(4): *1.27 P1.9 | length 38
  Top Layer w0.152: P1.9 -20.08,16.2 -7.869,16.2 -1.051,9.382 -1.051,9.185 v2(-0.983,9.117) ; v2(-1,8) *1.27
  Bottom Layer w0.152: v2(-1,8) -0.991,8.009 -0.991,9.109 v2(-0.983,9.117)
IDV_COUNT(5): *1.45 P2.11 | length 40.2
  Top Layer w0.152: v2(-1,7) *1.45
  Bottom Layer w0.152: v2(-1,7) -1.5,7.5 -1.5,9.5 10.5,21.5 23.84,21.5 P2.11
IDV_COUNT(6): *1.7 P1.7 | length 40.4
  Top Layer w0.152: P1.7 -23.76,14.8 -7.818,14.8 -2.507,9.49 -2.507,8.507 *1.7
IDV_COUNT(7): *1.24 P1.4 | length 47.6
  Top Layer w0.152: P1.4 -29.38,12.8 -7.5,12.8 -4.068,9.368 -4.068,9.168 v2(-4,9.1) ; v2(-4,8) *1.24
  Bottom Layer w0.152: v2(-4,8) v2(-4,9.1)
IDV_ENABLE(0): *1.276 P4.8 | length 34.1
  Top Layer w0.152: v2(-4,-7) *1.276
  Bottom Layer w0.152: v2(-4,-7) -3.5,-7.5 -3.5,-9.6 8.3,-21.4 17.52,-21.4 P4.8
IDV_ENABLE(2): *1.277 P4.9 | length 35.6
  Top Layer w0.152: v2(-3,-7) *1.277
  Bottom Layer w0.152: v2(-3,-7) -2.5,-7.5 -2.5,-9.5 8.9,-20.9 19.56,-20.9 P4.9
IDV_ENABLE(3): *1.311 P3.3 | length 48.6
  Top Layer w0.152: P3.3 -33.72,-13.2 -7.2,-13.2 -4.5,-10.5 *1.311
IDV_ENABLE(4): *1.295 P3.6 | length 43.8
  Top Layer w0.152: P3.6 -27.7,-14.8 -7.169,-14.8 -3,-10.631 v2(-3,-9) ; v2(-3,-8) *1.295
  Bottom Layer w0.152: v2(-3,-9) v2(-3,-8)
IDV_ENABLE(5): *1.314 P3.8 | length 39
  Top Layer w0.152: P3.8 -23.42,-15.6 -6.4,-15.6 -1.5,-10.7 *1.314
IDV_ENABLE(7): *1.278 P4.10 | length 37.1
  Top Layer w0.152: v2(-2,-7) *1.278
  Bottom Layer w0.152: v2(-2,-7) -1.5,-7.5 -1.5,-9.5 9.4,-20.4 21.6,-20.4 P4.10
IDV_ENBALE(1): *1.312 P3.5 | length 44.6
  Top Layer w0.152: P3.5 -29.64,-14.2 -7,-14.2 -3.5,-10.7 *1.312
IDV_ENBALE(6): *1.313 P3.7 | length 40.6
  Top Layer w0.152: P3.7 -25.56,-15.2 -6.9,-15.2 -2.5,-10.8 *1.313
ISEL(0): *1.42 P2.8 | length 35.6
  Top Layer w0.152: v2(-4,7) *1.42
  Bottom Layer w0.152: v2(-4,7) -4.5,7.5 -4.5,9.5 9.8,23.8 18.52,23.8 P2.8
ISEL(1): *1.43 P2.9 | length 37.2
  Top Layer w0.152: v2(-3,7) *1.43
  Bottom Layer w0.152: v2(-3,7) -3.5,7.5 -3.5,9.5 10.1,23.1 20.36,23.1 P2.9
ISEL(2): *1.41 P2.7 | length 34
  Top Layer w0.152: v2(-5,7) *1.41
  Bottom Layer w0.152: v2(-5,7) -5.5,7.5 -5.5,9.418 9.482,24.4 16.58,24.4 P2.7
ISEL(3): *1.6 P1.5 | length 44.5
  Top Layer w0.152: P1.5 -27.54,13.5 -7.518,13.5 -3.5,9.482 *1.6
NC1: *1.282 P4.14 | length 43.3
  Top Layer w0.152: v2(2,-7) *1.282
  Bottom Layer w0.152: v2(2,-7) 2.5,-7.5 2.5,-9.6 11,-18.1 29.46,-18.1 P4.14
NC2: *1.316 P3.12 | length 31
  Top Layer w0.152: P3.12 -15.26,-17.6 -6.2,-17.6 0.5,-10.9 *1.316
NC3: *1.294 P3.4 | length 47.9
  Top Layer w0.152: P3.4 -31.68,-13.7 -7.1,-13.7 -4,-10.6 v2(-4,-9) ; v2(-4.015,-7.985) -4,-7.985 -3.515,-7.5 *1.294
  Bottom Layer w0.152: v2(-4.015,-7.985) -4.007,-7.993 -4.007,-8.993 v2(-4,-9)
PADN_LVDS_RX: *1.215 J3.1 | length 21.5
  Top Layer w0.348: *1.215 v2(8,-3)
  Bottom Layer w0.348: v2(8,-3) 9.8,-4.8 27.712,-4.8 J3.1
PADN_LVDS_TX1: *1.144 J1.1 | length 24.5
  Top Layer w0.348: *1.144 20.716,13.716 J1.1
PADN_LVDS_TX2: *1.180 J2.1 | length 21.5
  Top Layer w0.348: *1.180 13.572,4.572 J2.1
PADP_LVDS_RX: *1.216 J4.1 | length 24.1
  Top Layer w0.348: *1.216 19.716,-13.716 J4.1
REF_CLK: *1.280 P4.12 | length 40.1
  Top Layer w0.152: v2(0,-7) *1.280
  Bottom Layer w0.152: v2(0,-7) 0.5,-7.5 0.5,-9.4 10.3,-19.2 25.48,-19.2 P4.12
RSTN: *1.279 P4.11 | length 38.7
  Top Layer w0.152: v2(-1,-7) *1.279
  Bottom Layer w0.152: v2(-1,-7) -0.5,-7.5 -0.5,-9.5 9.7,-19.7 23.44,-19.7 P4.11
SELCTR: *1.297 P3.9 | length 38.2
  Top Layer w0.152: P3.9 -21.38,-16.1 -6.469,-16.1 -0.983,-10.614 -0.983,-9.017 v2(-1,-9) ; v2(-1,-8) *1.297
  Bottom Layer w0.152: v2(-1,-9) v2(-1,-8)
TCK: *1.318 P3.15 | length 25.5
  Top Layer w0.152: P3.15 -9.24,-19.2 -5.6,-19.2 2.5,-11.1 *1.318
TDI: *1.300 P3.14 | length 28.5
  Top Layer w0.152: P3.14 -11.18,-18.6 -5.8,-18.6 2,-10.8 v2(2,-9) ; v2(2,-8) *1.300
  Bottom Layer w0.152: v2(2,-9) v2(2,-8)
TDO: *1.298 P3.11 | length 34.1
  Top Layer w0.152: P3.11 -17.4,-17.2 -6.5,-17.2 0,-10.7 v2(0,-9) ; v2(0,-8) *1.298
  Bottom Layer w0.152: v2(0,-9) v2(0,-8)
TMS: *1.281 P4.13 | length 41.8
  Top Layer w0.152: v2(1,-7) *1.281
  Bottom Layer w0.152: v2(1,-7) 1.5,-7.5 1.5,-9.595 10.705,-18.8 27.62,-18.8 P4.13
TRSTN: *1.317 P3.13 | length 29.3
  Top Layer w0.152: P3.13 -13.22,-18.1 -6,-18.1 1.5,-10.6 *1.317
VDD: *1.79 *1.80 *1.81 *1.82 *1.83 *1.84 *1.97 *1.98 *1.99 *1.100 *1.101 *1.102 *1.133 *1.134 *1.151 *1.153 *1.154 *1.156 *1.187 *1.192 *1.205 *1.206 *1.209 *1.210 *1.241 *1.242 *1.243 *1.244 *1.245 *1.246 C22.2 C23.2 C24.2 P4.1 P4.2 P4.3 | length 22
  Top Layer w0.152: v2(-3.015,0.985) v2@-3,1 ; v2(-3,-4) *1.241 ; v2(-3,-2) *1.205 ; v2(-3,-1) *1.187 ; *1.151 v2@-3,1 ; *1.133 -2.86,1.14 v2@-3,1 ; *1.97 v2(-3,4) *1.79 ; v2(-2,-4) *1.242 ; v2(-2,-2) *1.206 ; *1.134 *1.153 ; *1.98 v2(-1,4) *1.99 ; *1.80 v2(-1,5) *1.81 ; v2(-1,-4) *1.243 ; v2(0,-4) *1.244 ; v2(0,1) 0.4,0.6 0.4,0.5 *1.154 ; v2(0,4) *1.100 ; v2(0,5) *1.82 ; v2(0.998,4.002) *1.101 ; v2(1,-2) *1.209 ; v2(1,5) *1.83 ; *1.245 v2(2,-4) *1.246 ; v2(2,4) *1.102 ; v2(2,5) *1.84 ; *1.210 v2(3,-2) *1.192 ; *1.156 v2(3,0)
  Bottom Layer w0.152: v2@-4.05,-5.1 -4,-5.05 v2(-4,-5.03) ; v2@-4.05,-1.9 -4,-1.95 v2(-4,-1.97)
  Bottom Layer w0.254: C24.2 -4.251,-3.16 -4.139,-3.049 -4.049,-3.049 v2(-4,-3)
  other v2: -1,1
VDD_BD: *1.190 C16.2 C17.2 C18.2 P4.5 | length 29.5
  Top Layer w0.508: *1.190 v2(1,-1) ; v2(7.7,-10.3) 7.7,-19.2 P4.5
  Bottom Layer w0.508: v2(1,-1) 2.75,-2.75 2.975,-2.975 3.949,-3.949 5.34,-5.34 5.34,-6.406 7.7,-8.766 v2(7.7,-10.3)
VDD_BDFS: *1.189 C13.2 C14.2 C15.2 P4.4 | length 31.4
  Top Layer w0.508: v2(-1,-1) *1.189 ; v2(6.9,-10.3) 6.9,-20.94 P4.4
  Bottom Layer w0.254: C13.2@-1.582,-1.218 -1.408,-1.218 -1.238,-1.049 -1.049,-1.049 v2(-1,-1) -0.718,-0.718
  Bottom Layer w0.508: v2(-1,-1) -0.05,-1.95 0.8,-2.8 0.8,-4.8 2,-6 3.949,-6 6.9,-8.951 v2(6.9,-10.3)
VDD_LVDS: *1.155 C10.2 C11.2 C12.2 P2.6 | length 31.5
  Top Layer w0.508: *1.155 v2(2,1) ; v2(10.2,10.4) 10.2,20.56 P2.6
  Bottom Layer w0.508: v2(2,1) 3.55,2.55 4.55,3.55 10.2,9.2 v2(10.2,10.4)
VDDIO: *1.152 C7.2 C8.2 C9.2 P2.3 | length 33.9
  Top Layer w0.508: v2(-2,1) *1.152
  Bottom Layer w0.508: v2(-2,1) -2.125,1.125 -4,3 -4.137,3.138 -5.654,4.654 -5.654,5.786 -6.76,6.893 -6.76,11.22 P2.3
VDDIO_BD: *1.137 *1.138 C4.2 C5.2 C6.2 P2.5 | length 30.2
  Top Layer w0.508: *1.137 v2(2,2) *1.138 ; v2(9.5,10.4) 9.5,22.4 P2.5
  Bottom Layer w0.508: v2(2,2) 2.615,2.615 4.022,4.022 9.5,9.5 v2(9.5,10.4)
VDDIO_BDFS: *1.135 *1.136 C1.2 C2.2 C3.2 P2.4 | length 36.5
  Top Layer w0.508: *1.135 v2(0,2) *1.136
  Bottom Layer w0.508: v2(0,2) -0.199,2 -0.5,2 -1.5,2 -1.613,2.113 -1.675,2.175 -2.2,2.7 -2.2,4.2 -3,5 -3.934,5 -6.1,7.166 -6.1,9.5 10.5,26.1 P2.4
VDDIO_LVDS: *1.191 C19.2 C20.2 C21.2 P4.6 | length 32.8
  Top Layer w0.508: *1.191 1.514,-1.5 2.014,-1 v2(2.03,-1) ; v2(8.5,-10.3) 8.5,-17.46 P4.6
  Bottom Layer w0.254: C20.2@4.282,-0.928 4.299,-0.91 4.299,-0.736 C20.2
  Bottom Layer w0.508: v2(2.03,-1) 2.273,-1.243 2.693,-1.243 3.018,-0.918 3.752,-1.652 ; C20.2@4.282,-0.928 4.282,-1.122 3.752,-1.652 ; v2(8.5,-10.3) 8.5,-8.5 6.2,-6.2 6.2,-3.104 4.748,-1.652 3.752,-1.652
WIRE_BDFS: *1.10 *1.30 P1.12 | length 33.5
  Top Layer w0.152: P1.12 -14.56,18.3 -8,18.3 0.861,9.439 0.861,9.139 v2(0.9,9.1) ; *1.10 0.5,8.604 0.9,9.004 v2@0.9,9.143 ; v2(2,8) *1.30
  Layer 2 w0.152: v2(0.9,9.1) v2(2,8)
WIRE_I2V_LVDS: *1.301 P3.16 | length 24.9
  Top Layer w0.152: P3.16 -7.1,-19.6 -5.1,-19.6 3,-11.5 v2(3,-9) ; v2(3,-8) *1.301
  Bottom Layer w0.152: v2(3,-9) v2(3,-8)
WIRE_IREF_LVDS: *1.283 P3.18 | length 23
  Top Layer w0.152: P3.18 4,-13.58 v2(4,-9) ; *1.283 3.515,-6.5 v2(4.015,-7)
  Bottom Layer w0.152: v2(4,-9) 4.007,-8.993 4.007,-7.007 v2(4.015,-7)
WIRECORE_BD: *1.13 P1.16 | length 24.1
  Top Layer w0.152: P1.16 3.5,10.4 *1.13
WIRECORE_BDFS: *1.46 P2.12 | length 41.8
  Top Layer w0.152: v2(0,7) *1.46
  Bottom Layer w0.152: v2(0,7) -0.483,7.483 -0.483,9.483 -0.5,9.5 10.6,20.6 25.48,20.6 P2.12
WIRECORE_LCDS: *1.50 P1.17 | length 25.9
  Top Layer w0.152: P1.17 4,12.44 v2(4,9.1) ; v2(3.993,7.022) 3.993,7.015 4.5,6.507 *1.50
  Bottom Layer w0.152: v2(3.993,7.022) 3.517,7.497 3.517,8.617 v2(4,9.1)
WSEL(0): *1.5 P1.3 | length 48.5
  Top Layer w0.152: P1.3 -31.32,12.2 -7.331,12.2 -4.507,9.376 -4.507,8.507 *1.5
WSEL(1): *1.275 P4.7 | length 32.5
  Top Layer w0.152: v2(-5,-7) *1.275
  Bottom Layer w0.152: v2(-5,-7) -4.517,-7.483 -4.517,-9.483 8,-22 15.58,-22 P4.7
pads on no net: *1.1 *1.2 *1.3 *1.4 *1.15 *1.16 *1.17 *1.18 *1.19 *1.21 *1.22 *1.33 *1.34 *1.36 *1.37 *1.38 *1.39 *1.40 *1.51 *1.52 *1.53 *1.54 *1.58 *1.59 *1.60 *1.67 *1.68 *1.69 *1.71 *1.72 *1.73 *1.74 *1.76 *1.78 *1.85 *1.87 *1.94 *1.95 *1.96 *1.103 *1.104 *1.105 *1.107 *1.108 *1.109 *1.110 *1.112 *1.113 *1.114 *1.121 *1.122 *1.123 *1.130 *1.132 *1.139 *1.141 *1.145 *1.146 *1.148 *1.149 *1.150 *1.157 *1.158 *1.159 *1.166 *1.167 *1.168 *1.175 *1.176 *1.177 *1.181 *1.182 *1.184 *1.186 *1.188 *1.193 *1.195 *1.202 *1.203 *1.204 *1.207 *1.208 *1.211 *1.212 *1.213 *1.217 *1.218 *1.220 *1.221 *1.222 *1.229 *1.230 *1.231 *1.238 *1.240 *1.247 *1.249 *1.251 *1.252 *1.253 *1.254 *1.256 *1.257 *1.258 *1.265 *1.266 *1.267 *1.271 *1.272 *1.273 *1.274 *1.284 *1.285 *1.286 *1.287 *1.288 *1.289 *1.291 *1.292 *1.303 *1.304 *1.306 *1.307 *1.308 *1.309 *1.310 *1.320 *1.321 *1.322 *1.323 *1.324 C15.1 P4.15 P4.16 P4.17 P4.18

## Polygon pours and split planes (outlines as drawn)
VDD on Layer 2 "VDD_L03_P002" (solid, pour order 2): 3.5,-17.4 9.6,-23.5 9.6,-25.9 1.8,-25.9 1.8,-23.4 1.7,-23.4 -4.345,-17.355 -4.345,6 3.5,6
GND on Layer 2 "GND_L03_P001" (solid, pour order 1): -51.5,27.4 -51.6,27.3 -51.5,27.2 -51.5,-26 -0.7,-26 -0.8,-25.9 -0.8,-22.5 -4.9,-18.4 -4.9,5.6 3.8,5.6 3.8,-16.8 10.4,-23.4 10.4,-26.2 52.1,-26.2 52.6,-25.7 52.6,27.4
GND on Layer 1 "GND_L02_P003" (solid, pour order 3): -51.6,27.5 -51.6,-25.9 52.5,-25.9 52.5,27.5
GND on Top Layer "GND_L01_P000" (solid, pour order 0): -51.6,27.4 -51.6,-26 52.5,-26 52.5,27.4
GND on Bottom Layer "GND_L04_P004" (solid, pour order 4): -51.6,27.5 -51.6,-25.9 52.5,-25.9 52.5,27.5

## Silkscreen, mask and mechanical layers (free items; w line width, h text height)
Top Overlay:
  text "GND" at 50.748,24.392 h2.03 r270
  text "JTDI" at -45.704,24.298 h2.03 r270
  text "nTRST" at -43.289,24.3 h2.03 r270
  text "JTMS" at -40.624,24.298 h2.03 r270
  text "UART0_TX" at -37.969,24.298 h2.03 r270
  text "VDDIO" at -35.627,24.3 h2.03 r270
  text "DEBUG_CLK_OUT" at -27.809,24.3 h2.03 r270
  text "SPI1_CS" at -15.109,24.3 h2.03 r270
  text "SPI1_MISO" at -12.569,24.3 h2.03 r270
  text "I2C0_SDA" at -7.489,24.3 h2.03 r270
  text "GND" at -5.147,24.3 h2.03 r270
  text "GND" at -2.607,24.3 h2.03 r270
  text "GND" at 2.473,24.3 h2.03 r270
  text "GND" at 5.013,24.3 h2.03 r270
  text "VDDIO" at 7.553,24.3 h2.03 r270
  text "GND" at 40.573,24.3 h2.03 r270
  text "GND" at 43.113,24.3 h2.03 r270
  text "GND" at 45.653,24.3 h2.03 r270
  text "GND" at 48.193,24.3 h2.03 r270
  text "SYS_CLK" at 25.546,24.182 h2.03 r270
  text "SPI1_SCLK" at 35.706,24.182 h2.03 r270
  text "SPI1_MOSI" at 38.246,24.182 h2.03 r270
  text "JTDO" at 17.811,24.181 h2.03 r270
  text "JTCK" at 20.351,24.181 h2.03 r270
  text "UART_RX" at 23.006,24.181 h2.03 r270
  text "JTAG_STATE0" at -15.029,-15.024 h2.03 r270
  text "JTAG_STATE3" at -20.109,-15.06 h2.03 r270
  text "JTAG_STATE2" at -17.569,-15.064 h2.03 r270
  text "TL_OUT_RDY" at 17.991,-15.062 h2.03 r270
  text "TL_OUT_DAT" at -40.429,-15.107 h2.03 r270
  text "JTAG_STATE1" at -25.189,-15.199 h2.03 r270
  text "TL_OUT_VAL" at 20.531,-15.256 h2.03 r270
  text "TL_IN_RDY" at -42.969,-16.273 h2.03 r270
  text "TL_IN_DAT" at -37.889,-16.318 h2.03 r270
  text "TL_IN_VAL" at -45.509,-16.466 h2.03 r270
  text "SPI0_SCLK" at -35.349,-16.705 h2.03 r270
  text "SPI0_DQ0" at -27.729,-17.092 h2.03 r270
  text "SPI0_DQ3" at -32.809,-17.128 h2.03 r270
  text "SPI0_DQ2" at -30.269,-17.132 h2.03 r270
  text "SPI0_DQ1" at 25.611,-17.267 h2.03 r270
  text "I2C1_SDA" at 35.771,-17.271 h2.03 r270
  text "I2C1_SCL" at 33.231,-17.549 h2.03 r270
  text "SPI0_CS" at 28.151,-18.145 h2.03 r270
  text "CUSTOM / BOOT" at 30,-18.179 h2.03 r270
  text "RESET" at -22.849,-19.306 h2.03 r270
  text "GPIO0" at -10.129,-19.443 h2.03 r270
  text "GPIO2" at -7.589,-19.482 h2.03 r270
  text "GND" at -50.787,-20.468 h2.03 r270
  text "GND" at -48.247,-20.468 h2.03 r270
  text "GND" at -5.067,-20.468 h2.03 r270
  text "GND" at -2.527,-20.468 h2.03 r270
  text "GND" at 48.273,-20.468 h2.03 r270
  text "GND" at 50.813,-20.468 h2.03 r270
Bottom Overlay:
  text "JLCJLCJLCJLC" at -50.804,-15.579 h2.03 r270
Mechanical 1:
  the board outline again, w0.254